# Altium PCB Motherboard.PcbDoc (part 2 of 5)
Units mm, origin at the board's own origin, x right, y up, seen from the top; angles counter-clockwise.
Board outline 133.86 x 67.84 mm, 4 copper layers (Top Layer, Power Plane, Ground Plane, Bottom Layer), stack 1.586 mm thick; 260 components, 155 nets, 877 pads, 1037 vias.
Unrouted connection lines stored in the file: 43.
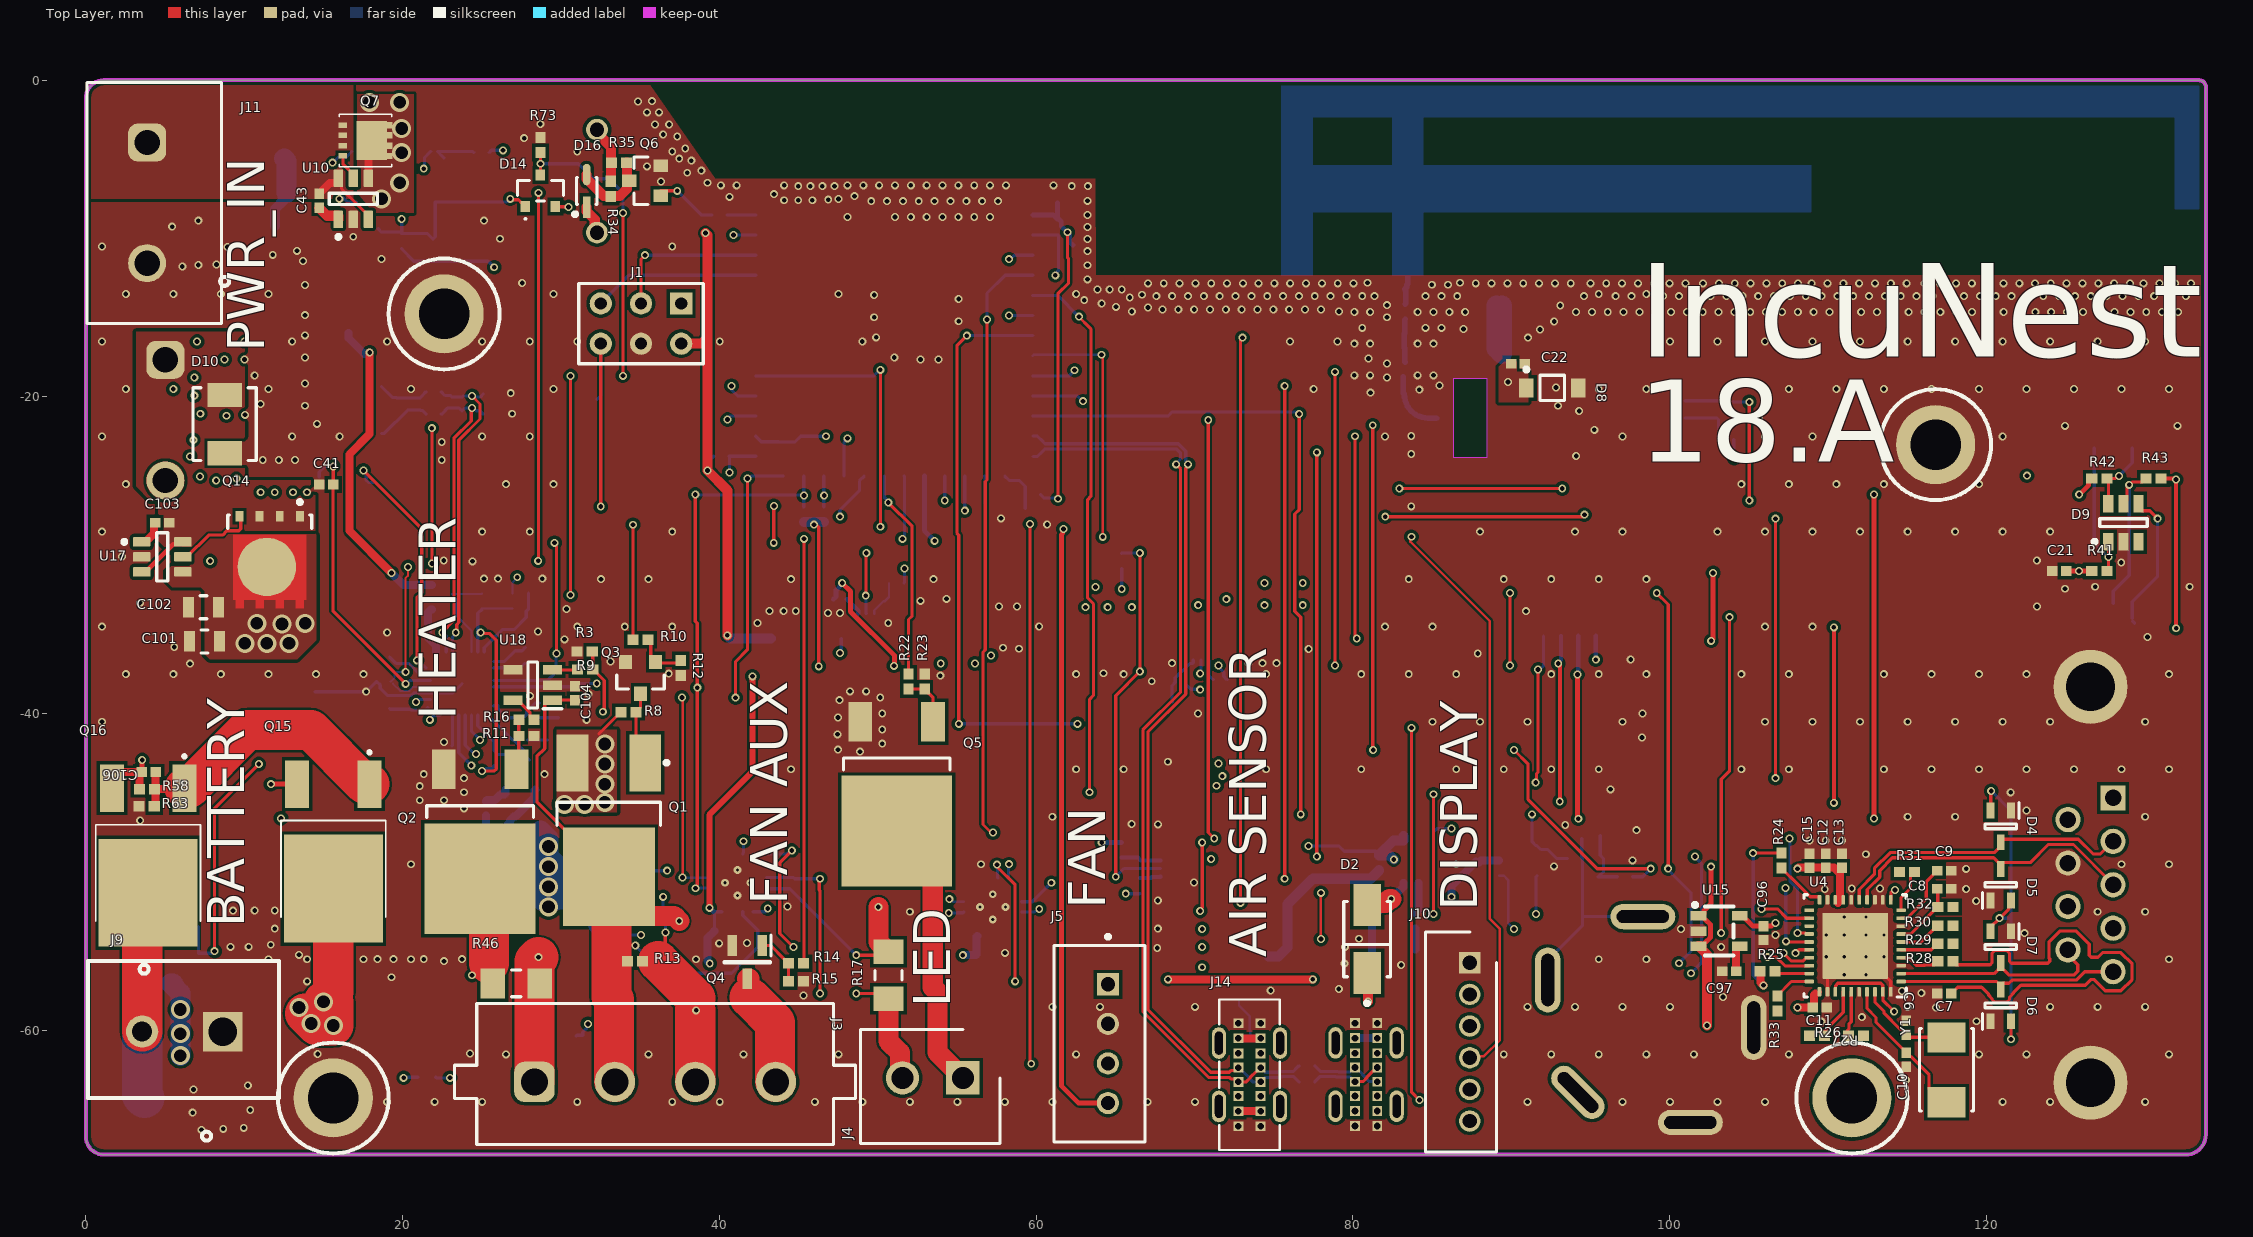
[diagram p0: Top Layer view]

## Part data (continued)
C107: library part CMP-2000-07374-1, "Aluminum Electrolytic Capacitor, 100 uF, +/- 20%, 16 V, -40 to 85 degC, 2-Pin SMD, RoHS, Tape and Reel", Capacitance=100µF, Case Size/Dimension=Ø6.3x5.4mm, LCSC_PN=C7469933, Manufacturer=Nichicon, Operating Temp-Max=85°C, Package Description="2-Pin Surface Mount Device, Body 6.6 x 6.6 mm", Package Reference=CAPAE7067X55, Rated Voltage=16V, Datasheet URL=http://nichicon-us.com/english/products/pdfs/e-uwx.pdf, Datasheet Version=08/2015, Manufacturer URL=http://www.nichicon.co.jp/english/, Mounting Technology=SurfaceMount, Type=Can
D1 D12: "TVS Diode (Bi-directional)", LCSC_PN=C383211, Manufacturer_Name=LRC, Height=0.7mm, Manufacturer_Part_Number=LESD5D5.0CT1G
D2: library part CMP-2000-04943-2, "DIODE SCHOTTKY 40V 1A SMA", Forward Current=1A, LCSC_PN=C2480, Manufacturer="ON Semiconductor", Max Junction Temp=+125°C, Max Repetitive Reverse Voltage=40V, Max Surge Forward Current=40A, Package=403AE, Peak Reverse Current=0.2mA, Temperature="-65°C to +125°C", Temperature Range Low=-65°C, Automotive=No, Category=Diode, ComponentLink2Description=Datasheet, ComponentLink2URL=https://www.onsemi.com/pub/Collateral/SS19-D.PDF, Device Class L1="Discrete Semiconductors", Device Class L2=Diodes, Device Class L3="Schottky Diodes", Digikey Description="DIODE SCHOTTKY 40V 1A SMA", Height=2.5mm, Lead Free=Yes, Manufacturer Part Number=SS14, Mouser Description="Schottky Diodes & Rectifiers SMA 40V 1.0A", Octopart=https://octopart.com/ss14-on+semiconductor-29205033, RoHS=TRUE, Standoff Height=0.05mm, Temperature Range High=+125°C
D4 D5 D6 D7: "Diode", LCSC_PN=C93035, Manufacturer_Name="Diodes Inc.", Mouser Part Number=621-BAV99W-F, Arrow Part Number=BAV99W-7-F, Arrow Price/Stock=https://www.arrow.com/en/products/bav99w-7-f/diodes-incorporated?region=europe, Datasheet Link=https://www.diodes.com/assets/Datasheets/ds30045.pdf, Height=1.1mm, Manufacturer_Part_Number=BAV99W-7-F, Mouser Price/Stock=https://www.mouser.co.uk/ProductDetail/Diodes-Incorporated/BAV99W-7-F?qs=KrBKXozF1ElcNxS3QKF7wg%3D%3D
D8: library part CMP-1060-00573-1, "Zener Voltage Regulator, 500 mW, 2-Pin SOD-123, Pb-Free, Tape and Reel", LCSC_PN=C2759896, Manufacturer="On Semiconductor", ComponentLink1Description="Manufacturer URL", ComponentLink1URL=http://www.onsemi.com/, ComponentLink2Description=Datasheet, ComponentLink2URL=http://www.onsemi.com/pub_link/Collateral/MMSZ5221BT1-D.PDF, ComponentLink3Description="Package Specification", ComponentLink3URL=http://www.onsemi.com/pub_link/Collateral/425-04.PDF, DatasheetVersion="Rev. 12", Mounting Technology="Surface Mount", P Max (W)=0.5, PackageDescription="2-Pin SOD, Body 1.6 x 2.69 mm", PackageReference=SOD-123-2-425-04, PackageVersion="Rev. G, 10/2009", Packing="Tape and Reel", PartNumber=MMSZ5231BT1G, RoHS=Pb-Free, VZ Typ (V)=5.1
D9: library part CMP-924f5b40f9684d88-1, "ESDA Series 5 Channel 6.1 V 50 pF SMT Uni Directional Transil Array - SOT-23-6L", Breakdown Voltage="7.20 V", Case/Package=SOT-23, LCSC Part=C6650, LCSC_PN=C2827672, Operating Voltage="6.10 V", Power Rating="100 W", Lead-Free Status="Lead Free", Lifecycle Status=Active, Manufacturer Part Number=ESDA6V1-5SC6, Mounting Style="Surface Mount", Number of Pins=6, Octopart URL=http://octopart.com/esda6v1-5sc6-stmicroelectronics-347713, OctopartID=924f5b40f9684d88, Packaging="Tape & Reel (TR), Cut Tape (CT)", REACH SVHC Compliance="No SVHC", RoHS=Compliant, Size-Height="1.45 mm", Size-Length="3.05 mm", Size-Width="1.75 mm", TME=ESDA6V1-5SC6, Voltage Rating (DC)="6.10 V"
D10: library part CMP-2000-07094-1, "TRANSZORB(R) Transient Voltage Suppressor, 24 V, -55 to 150 degC, 2-Pin DO-214AA (SMBJ), RoHS, Tape and Reel", Breakdown Voltage Max=29.5V, Breakdown Voltage Min=26.7V, Clamping Voltage Vc Max=38.9V, Diode Case Style=DO-214AA, LCSC_PN=C83268, Manufacturer=Vishay, Package Description="2-Pin Surface Mount Device, Body 4.315 x 3.62 mm", Peak Pulse Current Ippm=14A, Peak Pulse Power Dissipation=600W, Reverse Stand-Off Voltage Vrwm=24V, Datasheet URL=http://www.vishay.com/docs/88392/smbj50a.pdf, Datasheet Version=02/2014, Manufacturer URL=http://www.vishay.com/, Mounting Technology=SurfaceMount, No. of Pins=2Pins, Package Reference=DO-214AA, Packaging=CutTape, Power Dissipation Pd=600W, Product Range=TRANSZORBSMBJSeries, SVHC=ToBeAdvised, TVS Polarity=Bidirectional
D11: library part CMP-12225-000040-1, "TVS DIODE 33V 69.7V SMB", Breakdown Voltage=36.7V, Clamping Voltage=53.3V, LCSC_PN=C83325, Manufacturer=STMicroelectronics, Max Junction Temp=+150°C, Package=SMB-CA, Peak Pulse Current=11.8A, Peak Pulse Power=600W, Reverse Standoff Voltage=33V, Temperature="-55°C to +150°C", Temperature Range Low=-55°C, Automotive=No, Category=Diode, ComponentLink2Description=Datasheet, ComponentLink2URL=https://www.st.com/resource/en/datasheet/smbj.pdf, Device Class L1="Circuit Protection", Device Class L2="TVS Diodes", Device Class L3=unset, Digikey Description="TVS DIODE 33V 69.7V SMB", Direction=Bidirectional, Height=2.65mm, Lead Free=Yes, Manufacturer Part Number=SMBJ33CA-TR, Mouser Description="TVS Diodes - Transient Voltage Suppressors 600W 33V Bidirect", Number Of Channels=1, Octopart=https://octopart.com/smbj33ca-tr-stmicroelectronics-347069, RoHS=TRUE, Standoff Height=0.05mm, Temperature Range High=+150°C
D13: library part CMP-08607-000021-1, "TVS DIODE 18V 29.2V DO214AA", Breakdown Voltage=20V, Clamping Voltage=29.2V, LCSC_PN=C83327, Manufacturer="Littelfuse Inc", Max Junction Temp=+150°C, Package=SMBJ, Peak Pulse Current=20.6A, Peak Pulse Power=600W, Reverse Standoff Voltage=18V, Temperature="-65°C to +150°C", Temperature Range Low=-65°C, Automotive=No, Category=Diode, ComponentLink2Description=Datasheet, ComponentLink2URL=https://www.littelfuse.com/~/media/electronics/datasheets/tvs_diodes/littelfuse_tvs_diode_smbj_datasheet.pdf.pdf, Device Class L1="Circuit Protection", Device Class L2="TVS Diodes", Device Class L3=unset, Digikey Description="TVS DIODE 18V 29.2V DO214AA", Direction=Bidirectional, Height=2.61mm, Lead Free=Yes, Manufacturer Part Number=SMBJ18CA, Mouser Description="SMBJ Series 29.2 V 0.6 kW Surface Mount Bi-Directional TVS Diode - DO-214AA", Number Of Channels=1, Octopart=https://octopart.com/smbj18ca-littelfuse-350695, RoHS=TRUE, Temperature Range High=+150°C